# Altium PCB SAU-G0-EX_microSD.PcbDoc
Units mil, origin at the board's own origin, x right, y up, seen from the top; angles counter-clockwise.
Board outline 734.77 x 767.84 mil, 2 copper layers (Top Layer, Bottom Layer), stack 35.802 mil thick; 15 components, 11 nets, 51 pads, 56 vias.
Unrouted connection lines stored in the file: 3.
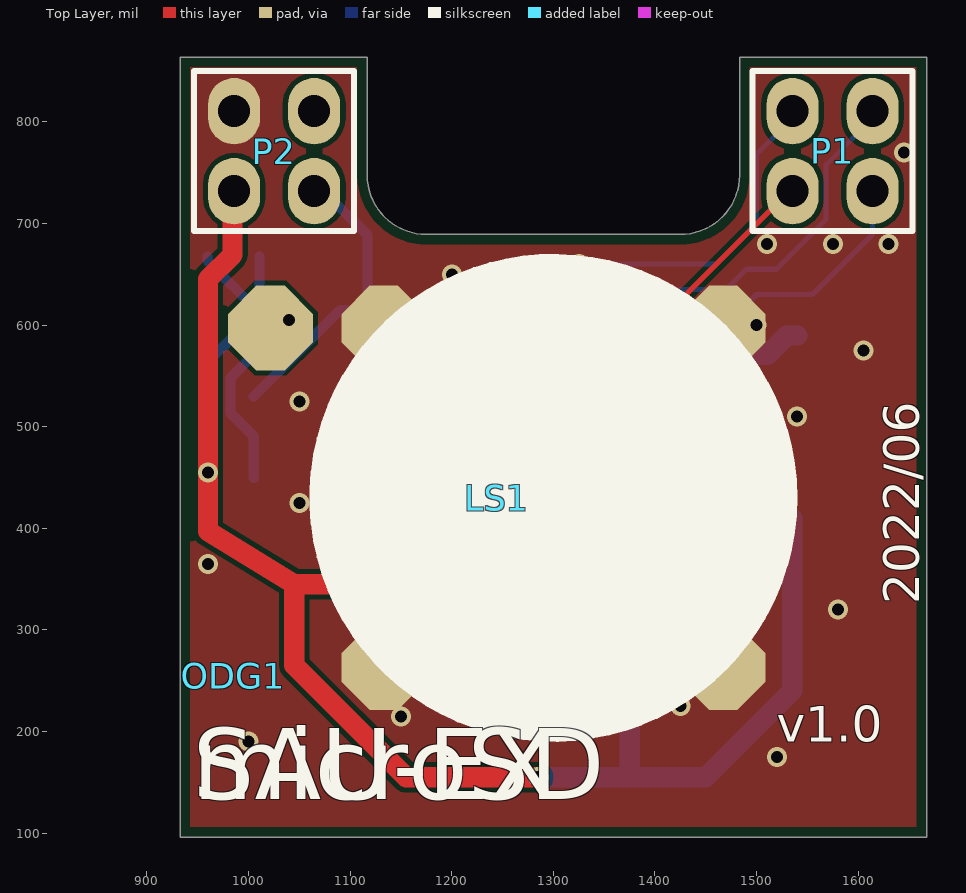
[diagram p0: Top Layer view]
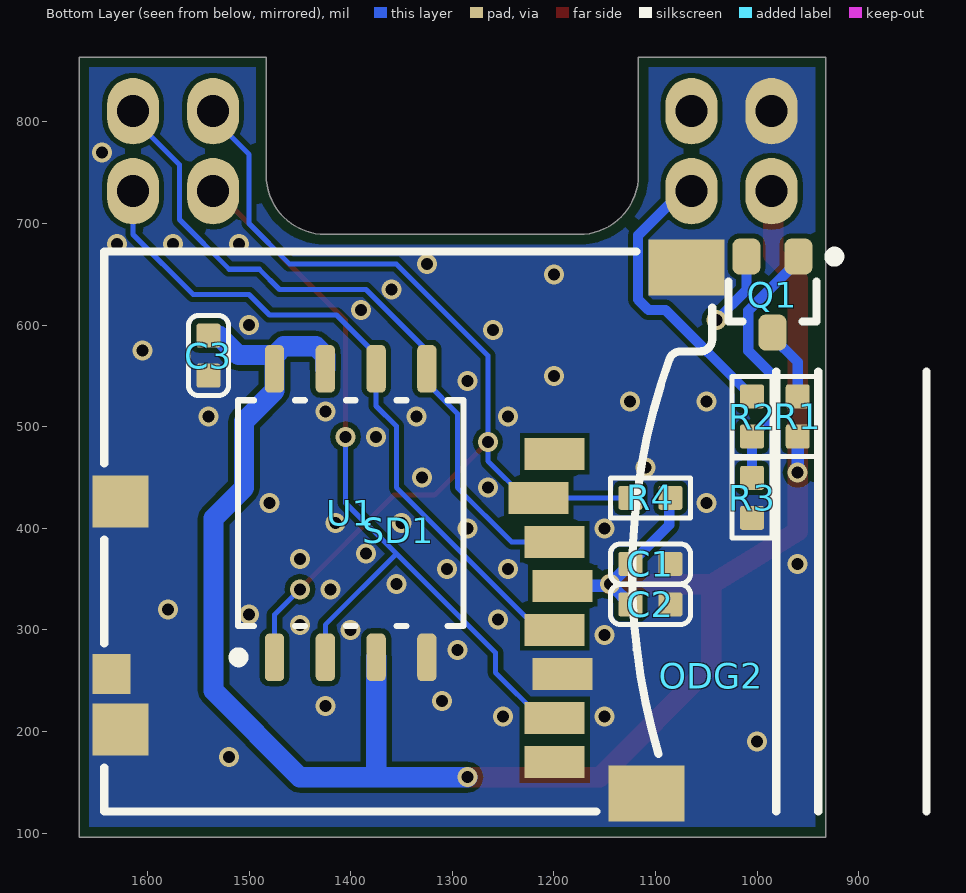
[diagram p1: Bottom Layer view, seen from below]

## Layer stack, top to bottom
Top Solder: solder mask 0.4, Solder Resist, Dk 3.5
Top Layer: signal copper 1.4
Dielectric 2: prepreg 2.8, PP-006, Dk 4.1
Dielectric 1: dielectric 27.4016, FR-4, Dk 4.8
Dielectric 3: prepreg 2.8, PP-006, Dk 4.1
Bottom Layer: signal copper 1.4
Bottom Solder: solder mask 0.4, Solder Resist, Dk 3.5

## Board outline
932.61,96 932.61,863.84 1116.78,863.84 1116.78,747.64 ccw(c1175.21,747.65) 1175.2,689.22 1424.8,689.22 ccw(c1424.79,747.65) 1483.22,747.64 1483.22,863.84 1667.39,863.84 1667.39,96

## Design rules (kind name [scope] priority, off if disabled: settings)
BoardOutlineClearance [All] p1: gap=10 ignorepadtopadclearanceinfootprint=FALSE except(0: Arc-SplitContinuation Track-SplitContinuation SMDPad-SplitContinuation THPad-SplitContinuation Via-SplitContinuation Fill-SplitContinuation Poly-SplitContinuation Region-SplitContinuation Text-SplitContinuation)
Clearance [All] p1: gap=5 ignorepadtopadclearanceinfootprint=FALSE except(0: Arc-Text Arc-Hole Track-Text Track-Hole SMDPad-Text SMDPad-Hole THPad-Text THPad-Hole Via-Text Via-Hole Fill-Text Fill-Hole Poly-Text Poly-Hole Region-Text Region-Hole Text-Text Text-Hole)
MinimumSolderMaskSliver [All] p1: minsoldermaskwidth=0
PlaneClearance [All] p1: clearance=10
PlaneConnect [All] p1: planeconnectstyle=Direct reliefexpansion=10 reliefentries=4 reliefconductorwidth=10 reliefairgap=10
PolygonConnect [All] p1: connectstyle=Direct reliefconductorwidth=10 reliefentries=4 polygonreliefangle="90 Angle" airgapwidth=10
RoutingVias [All] p1: holewidth=11.81 width=19.68 viastyle="Through Hole" minholewidth=11.81 minwidth=19.68 maxholewidth=196.85 maxwidth=196.85
SilkToSilkClearance [All] p1: silktosilkclearance=0
SilkToSolderMaskClearance [IsPad] p1: minsilkscreentomaskgap=0 clearancetoexposedcopper=TRUE
SolderMaskExpansion [All] p1: expansion=2
Width [All] p1: maxlimit=100 minlimit=5 preferedwidth=5
25 further rules are at their usual default settings.

## Components (designator, comment, footprint, x,y, rotation, side; value= is the part's Value field where it differs from the comment)
C1 "1uF" C0402 1105,365 r0 bottom value=0.1u
C2 "100nF" C0402 1105,325 r0 bottom value=0.1u
C3 "100nF" C0402 1540,570 r270 bottom value=0.1u
LS1 "Speaker" 压电陶瓷蜂鸣片12MM 1300,430 r315 top
ODG1 "ODG_LOGO" ODG_LOGO_soldermask 985,255 r0 top
ODG2 "ODG_LOGO" ODG_LOGO_soldermask 1045,255 r180 bottom
P1 "Male" 2.0MM_MALE_2X2 1574.79,771.25 r0 top
P2 "Male" 2.0mm_Male_2x2 1025.18,771.25 r0 top
Q1 "NPN" "DIODES SOT-323-3" 985,630 r270 bottom
R1 "100R" R0402 960,510 r270 bottom value=22R
R2 "1K" R0402 1005,510 r270 bottom value=22R
R3 "10K" R0402 1005,430 r90 bottom value=22R
R4 "100K" R0402 1105,430 r180 bottom value=22R
SD1 "Molex_473521001_microSD_Card" MOLEX_473521001_MICROSD_CARD 1642.56,121.34 r180 bottom locked
U1 "W25Qxx" WIN_SS-8_WIN-L 1400,415 r90 bottom

## Footprints (in the part's own frame and the unit in brackets; to place one, negate y for a bottom-side part, rotate by r counter-clockwise, add the part's x,y. Pads: shape width x height; smd on the part's side, far side on the other; paste and mask are expansions set on the pad)
2.0MM_MALE_2X2 [mm]
  oval 1.3x1.66 hole 0.8: 1(-1,1) 2(1,1) 3(-1,-1) 4(1,-1)
  silkscreen extent -2,-2 2,2, body extent -2,-2 2,2, height 5.7
2.0mm_Male_2x2 [mm]
  oval 1.3x1.66 hole 0.8: 1(-1,1) 2(1,1) 3(-1,-1) 4(1,-1)
  silkscreen extent -2,-2 2,2, body extent -2,-2 2,2, height 5.7
C0402 [mm]
  rrect20% 0.6x0.6 smd: 1(-0.5,0) 2(0.5,0)
  silkscreen extent -1,-0.5 1,0.5, body extent -0.5,-0.26 0.5,0.26, height 0.52
"DIODES SOT-323-3" [mm] "SOT323, 3-Leads, Body 2.00x2.10mm, Pitch 0.65mm, IPC Medium Density"
  rrect50% 0.9x0.7 smd: 1(-0.95,0.65) 2(-0.95,-0.65) 3(0.95,0)
  silkscreen extent -1.07,-1.1 0.67,1.67, body extent -1.06,-1 1.06,1, height 1
MOLEX_473521001_MICROSD_CARD [mm]
  rect 1.5x0.8 smd: 1(11.26,8.94) 2(10.86,7.84) 3(11.26,6.74) 4(11.46,5.64) 5(11.26,4.54) 6(11.46,3.44) 7(11.26,2.34) 8(11.26,1.24)
  rect 0.95x1 smd: 9(0.175,3.44)
  rect 1.9x1.4 smd: 10(13.55,0.45) 10_1(14.55,13.6)
  rect 1.4x1.3 smd: 10_2(0.4,7.75) 10_3(0.4,2.05)
  silkscreen extent 0,0 20.56,14, body extent 0,0 15.2,14.1, height 1.85
ODG_LOGO_soldermask [mil]
R0402 [mm]
  rrect20% 0.6x0.6 smd: 1(-0.5,0) 2(0.5,0)
  silkscreen extent -1,-0.5 1,0.5, body extent -0.5,-0.25 0.5,0.25, height 0.35
WIN_SS-8_WIN-L [mil]
  rrect50% 47x19 smd paste+0 mask+0: 1(-142,75) 2(-142,25) 3(-142,-25) 4(-142,-75) 5(142,-75) 6(142,-25) 7(142,25) 8(142,75)
  silkscreen extent -147,-111 111,115, body extent -159,-106 159,106, height 85
压电陶瓷蜂鸣片12MM [mm]
  oct 2x2 smd: 1(-8,-2) 2(-6,0) 2_1(0,-6) 2_2(6,0) 2_3(0,6)
  silkscreen extent -6,-6 6,6, body extent -6,-6 6,6, height 0.46

## Part data
C1 C2 C3: library part CAP, "Capacitor"
LS1: "蜂鸣器"
P1 P2: library part CONN_2X2
Q1: "NPN型", BOM名称=高频放大-NPN型, 学习资源=www.ooocke.com, 属性="40V 1.5A 1W 100MHZ", 版权归属=源创客
R1 R2 R3 R4: library part RES, "Resistor"
SD1: "473521001 / 1.10mm Pitch microSD Card Connector, Push-Push Type, with VSS (Supply Voltage Ground) Detect Switch, Lead-Free"
U1: "No Description Available", Manufacturer_Part_Number=W25Q16DVSSIG, Mfr_Name=Winbond, Copyright="Copyright (C) 2022 Ultra Librarian. All rights reserved.", RefDes=RefDes, Type=DEV

## Via types
v1: diameter 19.68, hole 11.81, Top Layer to Bottom Layer, tented both sides, 56 vias

## Nets (pads, with @x,y where several pads share a name; then routed paths per layer and width w, separated by ;. In a path a pad name is that pad's centre, name@x,y a point inside that pad or via, vN(x,y) a via of type N, cw(c..) or ccw(c..) an arc to the next point about the centre after c; other vN are vias at no path point)
3V3: C1.2 C2.2 C3.1 P2.3 R1.2 R4.2 SD1.4 U1.3 U1.7 U1.8 | length 2027.5
  Top Layer w20: P2.3 984.2,730.26 984.2,669.2 960,645 v1(960,455) 960,397.14 1045,345 ; v1(1145,345) 1045,345 ; v1(1285,155) 1155,155 1045,265 1045,345
  Bottom Layer w10: R4.2 1086.5,428.82 1086.5,403.19 C1.2
  Bottom Layer w12: v1(960,455) R1.2 ; C2.2 v1@1143.07,343.39 ; C1.2 v1@1143.07,346.61 ; v1@1145,343.39 SD1.4
  Bottom Layer w20: v1(1285,155) 1375,155 ; U1.3 1375,155 ; U1.7 1425,570 1434.19,579.19 1465.81,579.19 U1.8@1475,570 ; C3.1 1529.68,589.68 1510.5,570.5 1475.5,570.5 U1.8@1475,570 ; 1375,155 1450,155 1535,240 1535,410 1505,440 1505,505.37 1475,535.37 U1.8 U1.8@1475,570
GND: C1.1 C2.1 C3.2 LS1.2 LS1.2_1 LS1.2_2 LS1.2_3 P2.1 R3.1 SD1.6 SD1.9 SD1.10 SD1.10_1 SD1.10_2 SD1.10_3 U1.4
  other v1: 1520,175 1000,190 1150,215 1250,215 1425,225 1310,230 1295,280 1150,295 1400,300 1450,305 1255,310 1500,315 1580,320 1420,340 1355,345 1245,360 1305,360 960,365 1450,370 1385,375 1150,400 1285,400 1350,405 1415,405 1050,425 1480,425 1265,440 1330,450 1110,460 1375,490 1245,510 1335,510 1540,510 1425,515 1050,525 1125,525 1285,545 1200,550 1605,575 1260,595 1500,600 1390,615 1360,635 1200,650 1325,660 1510,680 1575,680 1630,680 1645,770
GPIO_ndef: P2.4 R2.1 | length 285.6
  Bottom Layer w10: R2.1 1090.32,615 1107.06,615 1117.13,625.07 1117.13,688.47 1073.72,731.88 P2.4
NetLS1_1: LS1.1 Q1.2 | length 74.6
  Bottom Layer w10: Q1.2 1010.59,634.41 v1(1040,605)
NetQ1_1: Q1.1 R2.2 R3.2 | length 257
  Bottom Layer w10: Q1.1 959.41,663.46 1008.78,614.09 1008.78,574.78 982.28,548.28 982.28,513.35 R2.2@1004.09,491.54 ; R3.2 R2.2
NetQ1_3: Q1.3 R1.1 | length 73.3
  Bottom Layer w10: R1.1 960,563.66 985,588.66 Q1.3
PB6/MISO2: P1.3 SD1.7 U1.2 | length 798.5
  Top Layer w5: v1(1405,490) 1405,604.53 1532.35,731.88 P1.3
  Bottom Layer w5: SD1.7 1213.03,213.47 1257.65,258.08 1257.65,277.65 1355,375 ; v1(1405,490) 1405,425 1355,375 ; U1.2 1425,305 1355,375
SCL1/SCK2: P1.4 SD1.5 U1.6 | length 683.8
  Bottom Layer w5: SD1.5 1215.08,300.08 1355,440 1355,500.47 1375,520.47 U1.6 1375,571 1414,610 1480,610 1500,630 1555,630 1614.16,689.16 P1.4
SDA1/MOSI2: P1.2 SD1.3 U1.5 | length 687.8
  Bottom Layer w5: SD1.3 1241.69,386.69 1295,440 1295,513 1325,543 U1.5 1325,575 1385,635 1470,635 1490,655 1519.64,655 1568.51,703.87 1568.51,757.88 1614.16,803.53 P1.2
SPI2_NSS: P1.1 R4.1 SD1.2 U1.1 | length 995.6
  Top Layer w5: v1(1265,485) 1317.34,432.66 1357.34,432.66 v1(1450,340)
  Bottom Layer w5: R4.1 SD1.2 1228.78,430 1265,466.22 v1(1265,485) 1265,570 1355,660 1460,660 1500,700 1500,768.11 1535.42,803.53 P1.1 ; v1(1450,340) 1475,315 U1.1
VbatWeek: P2.2
pads on no net: SD1.1 SD1.8

## Polygon pours and split planes (outlines as drawn)
GND on Top Layer "vcc-2" (solid, remove dead copper, pour order 62): 1700,900 900,900 900,50 1700,50
GND on Bottom Layer "vcc-2" (solid, remove dead copper, pour order 64): 1700,900 900,900 900,50 1700,50

## Silkscreen, mask and mechanical layers (free items; w line width, h text height)
Top Overlay:
  circle w5.98: c1300,430 r235.37
  region: 1064.63,430 ccw(c1300,430) 1300,194.63 ccw(c1300,430) 1535.37,430 ccw(c1300,430) 1300,665.37 ccw(c1300,430)
  text "2022/06" at 1660,325 h35 r90
  text "v1.0" at 1520,190 h35
  text "microSD" at 945,110 h120
  text "SAU-EX" at 945,110 h120
Mechanical 1:
  the board outline again, w6
Mechanical 2:
  lines w6: 932.61,479.92 1667.39,479.92 ; 1300,96 1300,863.84

## Text inside footprints (layer, text, board x,y; h text height)
U1: Mechanical 13 "*" at 1453,311.5 h50 r270